# EAGLE board Memory V1.2.brd.old (EAGLE 9.6.2)
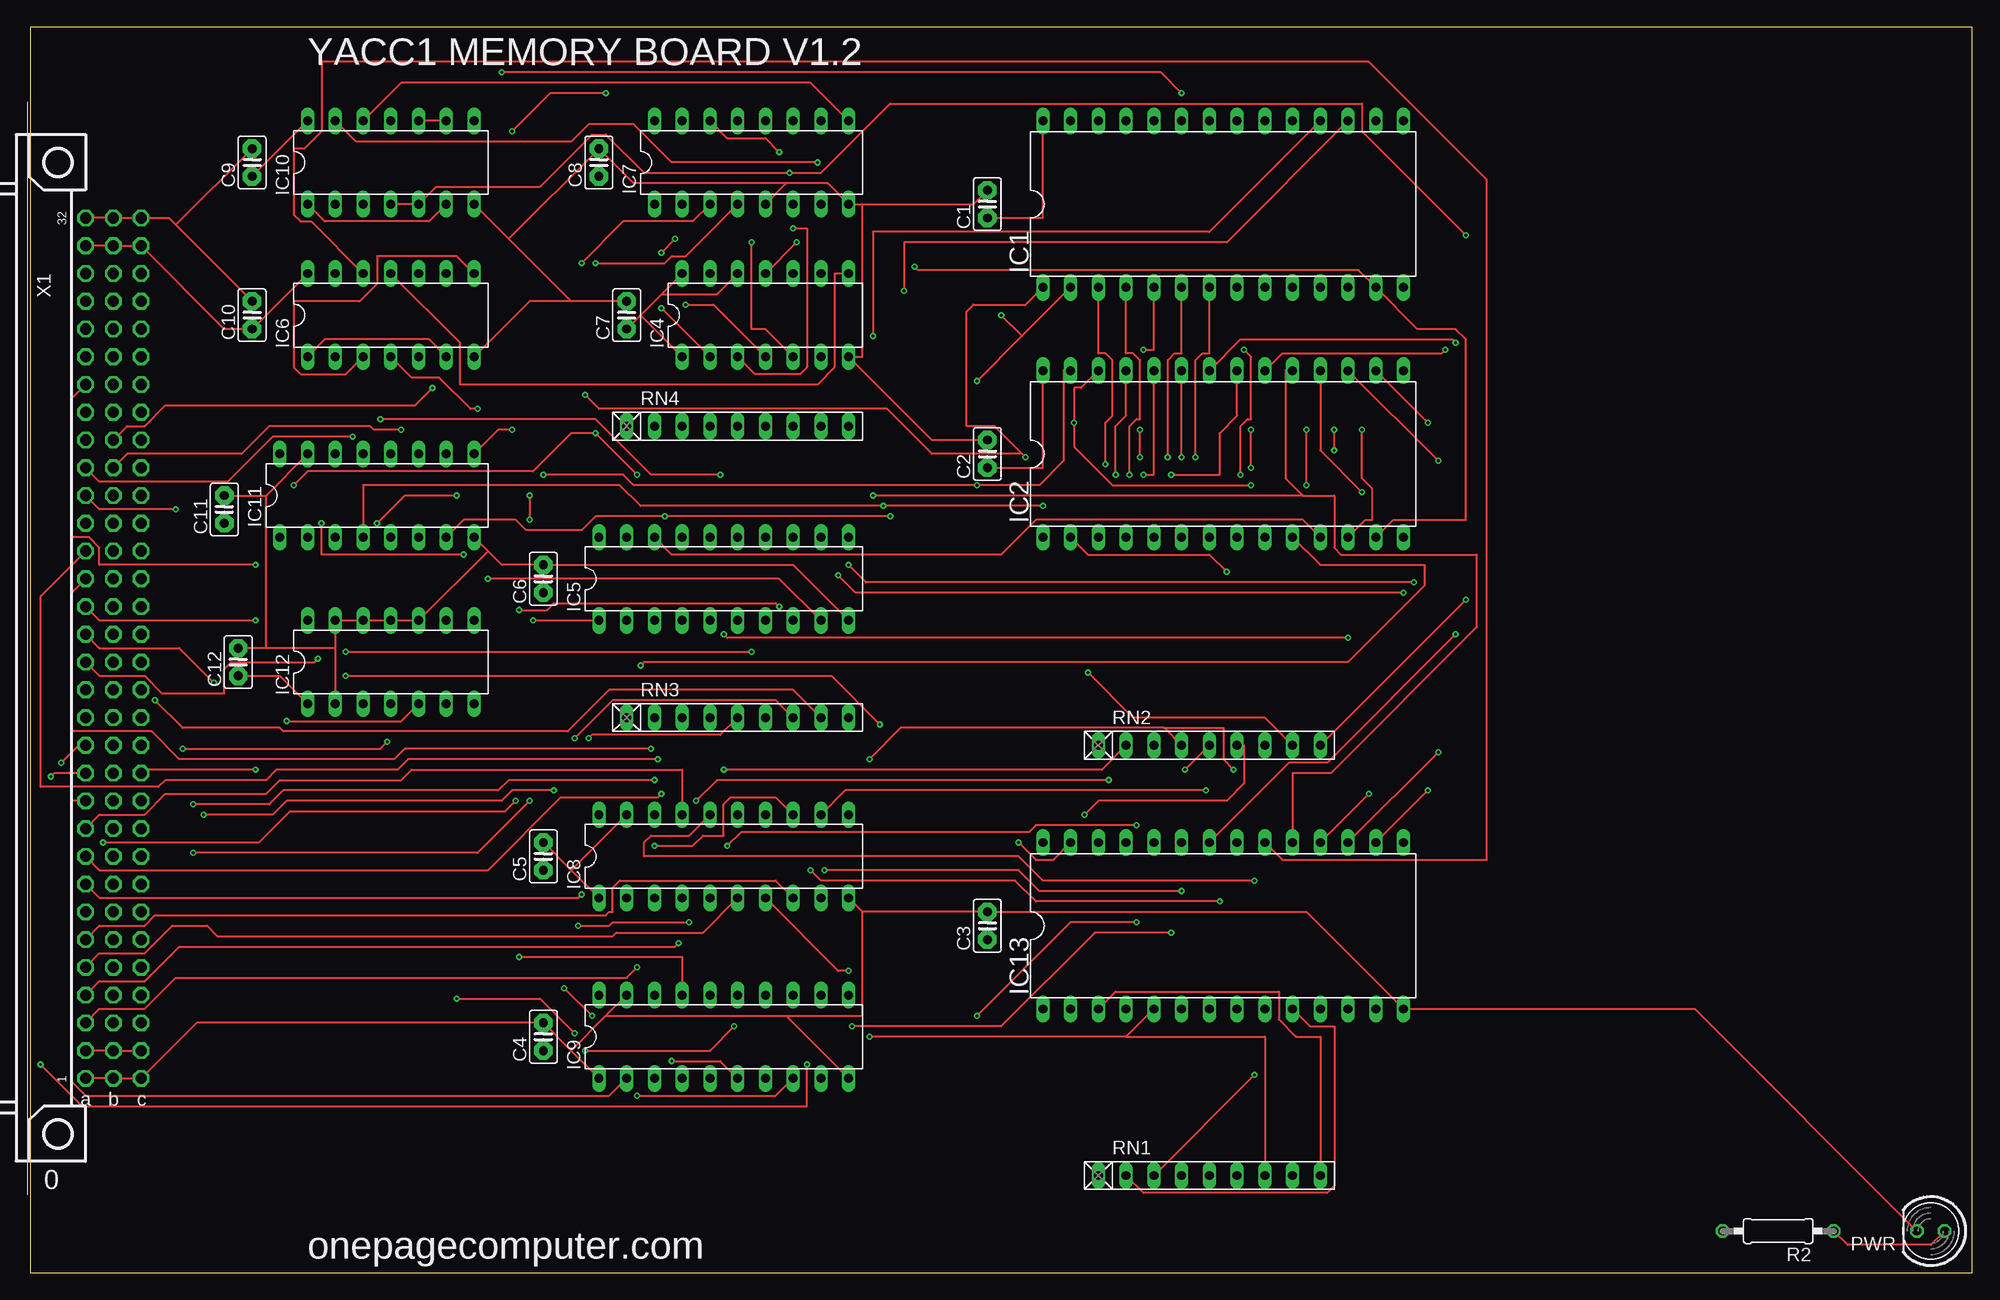
[diagram p0: board, top side]
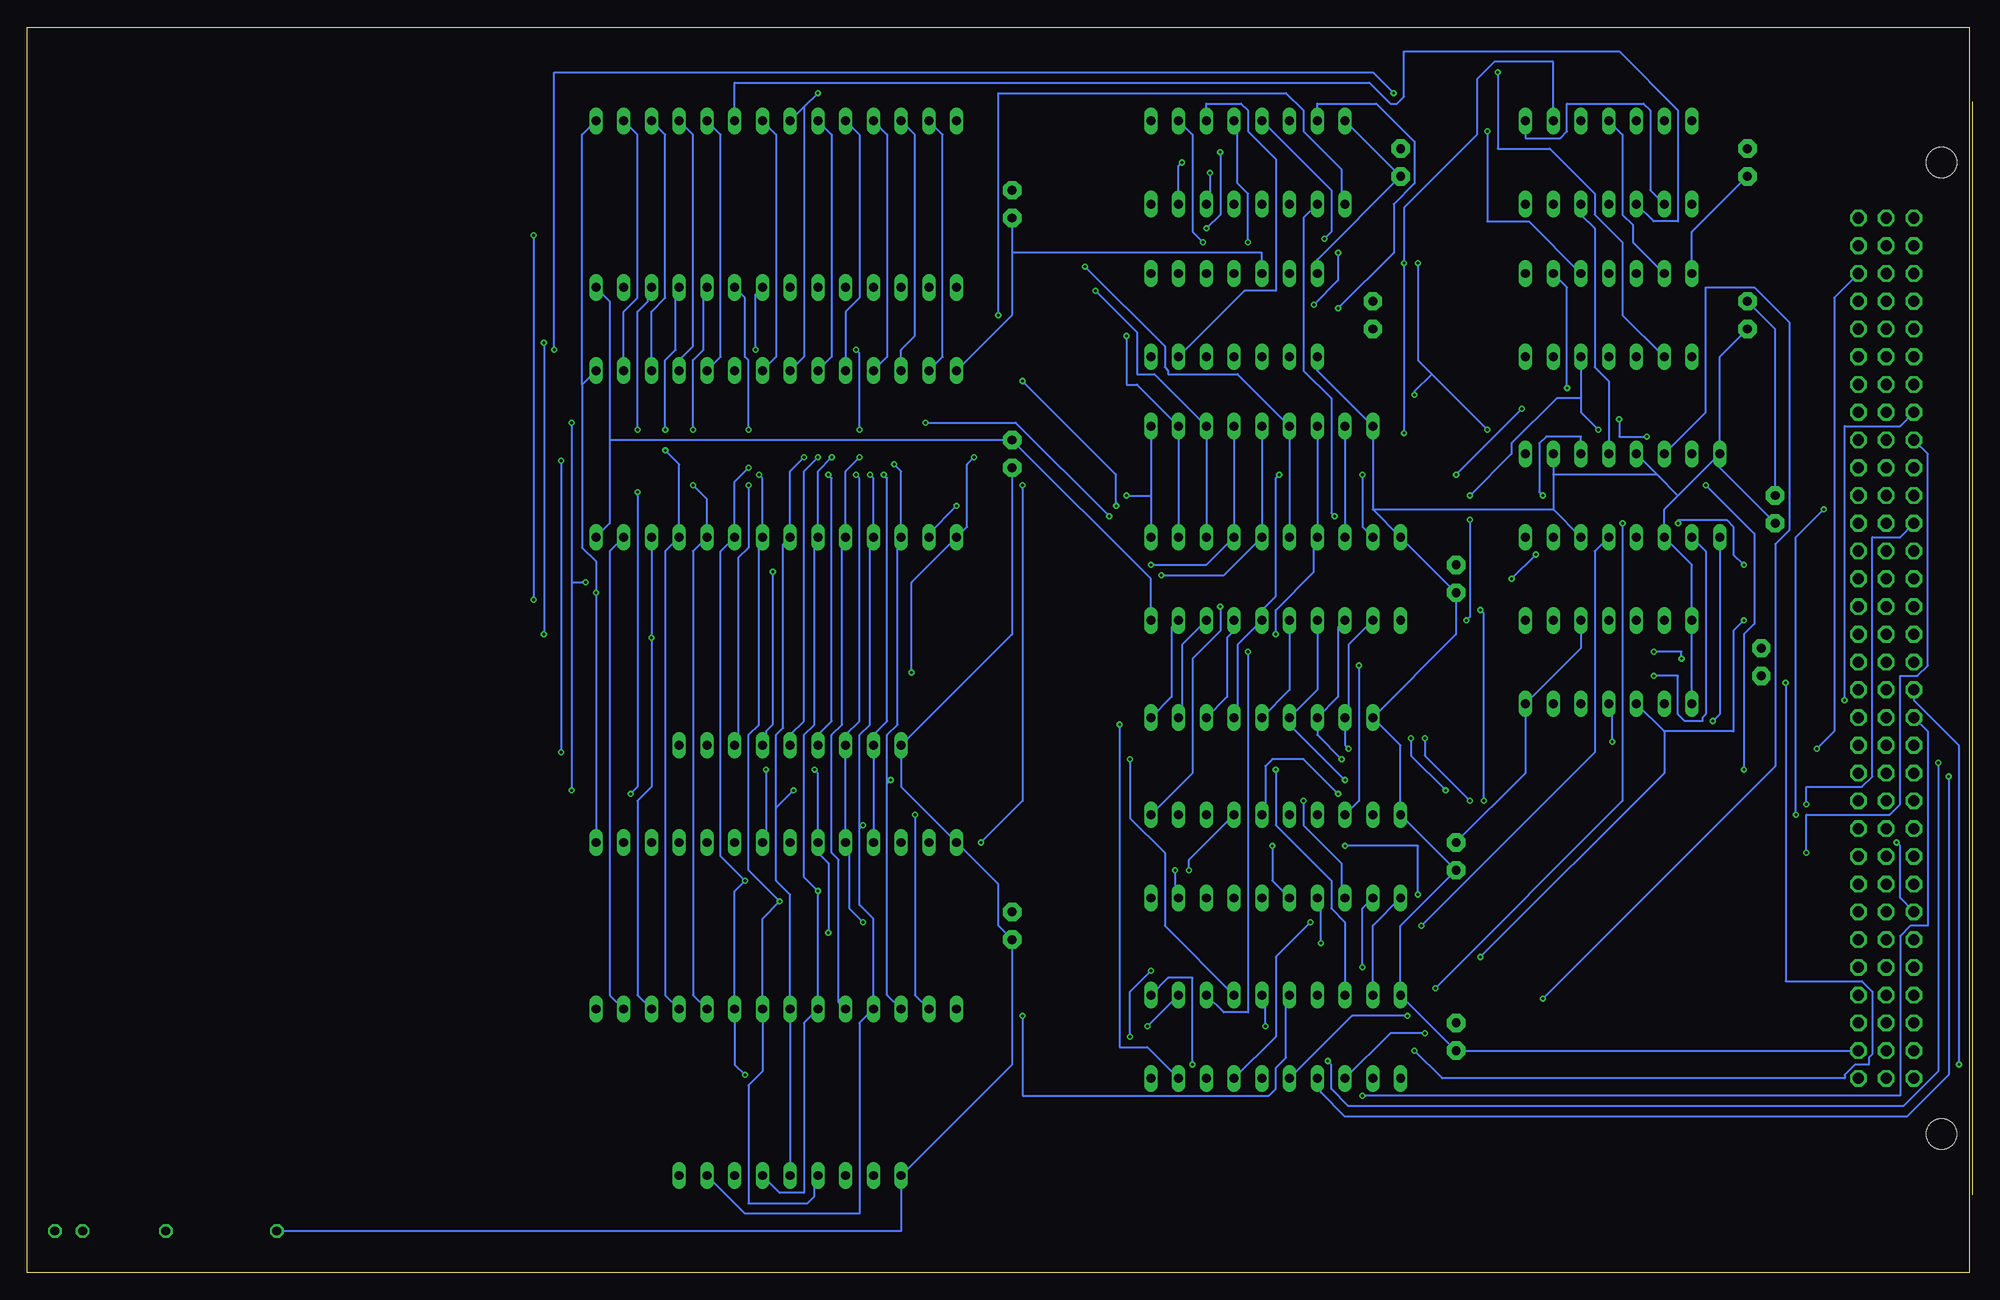
[diagram p1: board, bottom side, seen from below]

Size 177.78 x 113.97 mm. Coordinates in mm from the lower left corner, seen from the top.
Outline: 0,0 177.78,0 177.78,113.97 0,113.97 0,0
Copper layers (1*16): Top 0.035559375mm / dielectric 1.6mm / Bottom 0.035559375mm
Design rules "oshpark-2layer-auto-routing *": minimum track width 8mil, minimum drill 10mil, track to track 24mil, track to pad 10mil, pad to pad 8mil, via to via 8mil, smd to smd 6mil, copper to edge 15mil, drill to drill 6mil, minimum pad ring 6mil, minimum via ring 6mil, stop-mask expansion 2.5mil, vias tented up to drill 0mil, thermal gap 10mil
Net classes: 1 GND: width 1 mm; 2 5V: width 1 mm

## Footprints (pad centres in the part's own frame; a part is rotated, then mirrored left to right if it is on the bottom)
C025-025X050 = drill 0.813 pad 1.676 octagon: 1 -1.27,0; 2 1.27,0
DIL28-6 = drill 0.813 long: 1 -16.51,-7.62; 2 -13.97,-7.62; 3 -11.43,-7.62; 4 -8.89,-7.62; 5 -6.35,-7.62; 6 -3.81,-7.62; 7 -1.27,-7.62; 8 1.27,-7.62; 9 3.81,-7.62; 10 6.35,-7.62; 11 8.89,-7.62; 12 11.43,-7.62; 13 13.97,-7.62; 14 16.51,-7.62; 15 16.51,7.62; 16 13.97,7.62; 17 11.43,7.62; 18 8.89,7.62; 19 6.35,7.62; 20 3.81,7.62; 21 1.27,7.62; 22 -1.27,7.62; 23 -3.81,7.62; 24 -6.35,7.62; 25 -8.89,7.62; 26 -11.43,7.62; 27 -13.97,7.62; 28 -16.51,7.62
DIL14 = drill 0.813 long: 1 -7.62,-3.81; 2 -5.08,-3.81; 3 -2.54,-3.81; 4 0,-3.81; 5 2.54,-3.81; 6 5.08,-3.81; 7 7.62,-3.81; 8 7.62,3.81; 9 5.08,3.81; 10 2.54,3.81; 11 0,3.81; 12 -2.54,3.81; 13 -5.08,3.81; 14 -7.62,3.81
DIL20 = drill 0.813 long: 1 -11.43,-3.81; 2 -8.89,-3.81; 3 -6.35,-3.81; 4 -3.81,-3.81; 5 -1.27,-3.81; 6 1.27,-3.81; 7 3.81,-3.81; 8 6.35,-3.81; 9 8.89,-3.81; 10 11.43,-3.81; 11 11.43,3.81; 12 8.89,3.81; 13 6.35,3.81; 14 3.81,3.81; 15 1.27,3.81; 16 -1.27,3.81; 17 -3.81,3.81; 18 -6.35,3.81; 19 -8.89,3.81; 20 -11.43,3.81
DIL16 = drill 0.813 long: 1 -8.89,-3.81; 2 -6.35,-3.81; 3 -3.81,-3.81; 4 -1.27,-3.81; 5 1.27,-3.81; 6 3.81,-3.81; 7 6.35,-3.81; 8 8.89,-3.81; 9 8.89,3.81; 10 6.35,3.81; 11 3.81,3.81; 12 1.27,3.81; 13 -1.27,3.81; 14 -3.81,3.81; 15 -6.35,3.81; 16 -8.89,3.81
LED5MM = drill 0.813 octagon: A -1.27,0; K 1.27,0
0207/10 = drill 0.813 octagon: 1 -5.08,0; 2 5.08,0
RN-9 = drill 0.813 long: 1 -10.16,0; 2 -7.62,0; 3 -5.08,0; 4 -2.54,0; 5 0,0; 6 2.54,0; 7 5.08,0; 8 7.62,0; 9 10.16,0
FABC96R = drill 1.016 octagon: A1 -2.54,39.37; A2 -2.54,36.83; A3 -2.54,34.29; A4 -2.54,31.75; A5 -2.54,29.21; A6 -2.54,26.67; A7 -2.54,24.13; A8 -2.54,21.59; A9 -2.54,19.05; A10 -2.54,16.51; A11 -2.54,13.97; A12 -2.54,11.43; A13 -2.54,8.89; A14 -2.54,6.35; A15 -2.54,3.81; A16 -2.54,1.27; A17 -2.54,-1.27; A18 -2.54,-3.81; A19 -2.54,-6.35; A20 -2.54,-8.89; A21 -2.54,-11.43; A22 -2.54,-13.97; A23 -2.54,-16.51; A24 -2.54,-19.05; A25 -2.54,-21.59; A26 -2.54,-24.13; A27 -2.54,-26.67; A28 -2.54,-29.21; A29 -2.54,-31.75; A30 -2.54,-34.29; A31 -2.54,-36.83; A32 -2.54,-39.37; B1 -5.08,39.37; B2 -5.08,36.83; B3 -5.08,34.29; B4 -5.08,31.75; B5 -5.08,29.21; B6 -5.08,26.67; B7 -5.08,24.13; B8 -5.08,21.59; B9 -5.08,19.05; B10 -5.08,16.51; B11 -5.08,13.97; B12 -5.08,11.43; B13 -5.08,8.89; B14 -5.08,6.35; B15 -5.08,3.81; B16 -5.08,1.27; B17 -5.08,-1.27; B18 -5.08,-3.81; B19 -5.08,-6.35; B20 -5.08,-8.89; B21 -5.08,-11.43; B22 -5.08,-13.97; B23 -5.08,-16.51; B24 -5.08,-19.05; B25 -5.08,-21.59; B26 -5.08,-24.13; B27 -5.08,-26.67; B28 -5.08,-29.21; B29 -5.08,-31.75; B30 -5.08,-34.29; B31 -5.08,-36.83; B32 -5.08,-39.37; C1 -7.62,39.37; C2 -7.62,36.83; C3 -7.62,34.29; C4 -7.62,31.75; C5 -7.62,29.21; C6 -7.62,26.67; C7 -7.62,24.13; C8 -7.62,21.59; C9 -7.62,19.05; C10 -7.62,16.51; C11 -7.62,13.97; C12 -7.62,11.43; C13 -7.62,8.89; C14 -7.62,6.35; C15 -7.62,3.81; C16 -7.62,1.27; C17 -7.62,-1.27; C18 -7.62,-3.81; C19 -7.62,-6.35; C20 -7.62,-8.89; C21 -7.62,-11.43; C22 -7.62,-13.97; C23 -7.62,-16.51; C24 -7.62,-19.05; C25 -7.62,-21.59; C26 -7.62,-24.13; C27 -7.62,-26.67; C28 -7.62,-29.21; C29 -7.62,-31.75; C30 -7.62,-34.29; C31 -7.62,-36.83; C32 -7.62,-39.37 | hole 2.794: 0,-44.456; 0,44.456

## Placement (x,y rotation side)
C1  [C025-025X050]  87.63,97.79 90 top
C2  [C025-025X050]  87.63,74.93 90 top
C3  [C025-025X050]  87.63,31.75 90 top
C4  [C025-025X050]  46.99,21.59 90 top
C5  [C025-025X050]  46.99,38.1 90 top
C6  [C025-025X050]  46.99,63.5 90 top
C7  [C025-025X050]  54.61,87.63 90 top
C8  [C025-025X050]  52.07,101.6 90 top
C9  [C025-025X050]  20.32,101.6 90 top
C10  [C025-025X050]  20.32,87.63 90 top
C11  [C025-025X050]  17.78,69.85 90 top
C12  [C025-025X050]  19.05,55.88 90 top
IC1  [DIL28-6]  109.22,97.79 0 top
IC2  [DIL28-6]  109.22,74.93 0 top
IC4  74ALS30N  [DIL14]  67.31,87.63 0 top
IC5  74LS245N  [DIL20]  63.5,63.5 0 top
IC6  74LS04N  [DIL14]  33.02,87.63 0 top
IC7  74LS138N  [DIL16]  66.04,101.6 0 top
IC8  74LS244N  [DIL20]  63.5,38.1 0 top
IC9  74LS244N  [DIL20]  63.5,21.59 0 top
IC10  74ALS00N  [DIL14]  33.02,101.6 0 top
IC11  74LS157N  [DIL16]  31.75,71.12 0 top
IC12  74LS74N  [DIL14]  33.02,55.88 0 top
IC13  [DIL28-6]  109.22,31.75 0 top
PWR  [LED5MM]  173.99,3.81 180 top
R2  330  [0207/10]  160.02,3.81 180 top
RN1  [RN-9]  107.95,8.89 0 top
RN2  [RN-9]  107.95,48.26 0 top
RN3  [RN-9]  64.77,50.8 0 top
RN4  [RN-9]  64.77,77.47 0 top
X1  FABC96R  [FABC96R]  2.54,57.15 180 top

## Library data of the parts
C1-C12 IC5 = adafruit
IC1 IC2 = memory-hitachi; OC_FARNELL: unknown; OC_NEWARK: unknown
IC4 IC6-IC12 = 74xx-us
IC13 = memory-nec; MPN: AT28C64B-15PU; OC_FARNELL: 1095784; OC_NEWARK: 96K6557
PWR = led
R2 = eagle-ltspice; SPICEMODEL: NONE; SPICEPREFIX: R
RN1-RN4 = resistor-net; OC_FARNELL: unknown; OC_NEWARK: unknown
X1 = con-vg

## Nets
-AC-LD: X1.C22
-AC-LD-INV: X1.C20
-AC-RD: X1.C21
-ADDR-REG-LD0: X1.C4
-ADDR-REG-LD1: X1.C6
-ADDR-REG-RD0: X1.C3
-ADDR-REG-RD1: X1.C5
-ALU-FUNC: X1.C15
-BUS-EN: X1.C28
-HI-RAM: IC2.20 IC6.10
-HL-SWAP: X1.C25
-IN: X1.C26
-INT: X1.C13
-INTA: X1.C14
-IO-ADDR-LD: X1.C11
-IO-RD: X1.B25
-IO-WR: X1.B26
-LO-RAM: IC1.20 IC10.3
-MEM-RD: IC5.1 IC6.5 X1.B23
-MEM-WR: IC6.9 X1.B24
-OUT: X1.C27
-REG-DN: X1.B21
-REG-FUNC-LD: X1.B8
-REG-FUNC-RD: X1.B7
-REG-LD-HI: X1.B20
-REG-LD-LO: X1.B18
-REG-RD-HI: X1.B19
-REG-RD-LO: X1.B17
-REG-UP: X1.B22
-RESET: IC12.4 X1.C30
-ROM-CS: IC6.12 IC13.20
-ROME000: IC7.9 IC10.12
-ROMF000: IC7.7 IC10.13
-RUN: X1.C29
-SR-LD: X1.C23
-TMP-REG-LD0: X1.B28
-TMP-REG-LD1: X1.B30
-TMP-REG-RD0: X1.B27
-TMP-REG-RD1: X1.B29
-VMA: IC5.19 IC7.4 IC10.9 IC10.10 X1.C12
ADDR0: IC8.2 X1.A3
ADDR1: IC8.4 X1.A4
ADDR2: IC8.6 X1.A5
ADDR3: IC8.8 X1.A6
ADDR4: IC8.11 X1.A7
ADDR5: IC8.13 X1.A8
ADDR6: IC8.15 X1.A9
ADDR7: IC8.17 X1.A10
ADDR8: IC9.2 X1.A11
ADDR9: IC9.4 X1.A12
ADDR10: IC9.6 X1.A13
ADDR11: IC9.8 X1.A14
ADDR12: IC9.11 X1.A15
ADDR13: IC9.13 X1.A16
ADDR14: IC9.15 X1.A17
ADDR15: IC9.17 IC12.3 X1.A18
ALU0: X1.C16
ALU1: X1.C17
ALU2: X1.C18
ALU3: X1.C19
BADDR0: IC1.10 IC2.10 IC8.18 IC13.10 RN1.2
BADDR1: IC1.9 IC2.9 IC8.16 IC13.9 RN1.3
BADDR2: IC1.8 IC2.8 IC8.14 IC13.8 RN1.4
BADDR3: IC1.7 IC2.7 IC8.12 IC13.7 RN1.5
BADDR4: IC1.6 IC2.6 IC8.9 IC13.6 RN1.6
BADDR5: IC1.5 IC2.5 IC8.7 IC13.5 RN1.7
BADDR6: IC1.4 IC2.4 IC8.5 IC13.4 RN1.8
BADDR7: IC1.3 IC2.3 IC8.3 IC13.3 RN1.9
BADDR8: IC1.25 IC2.25 IC9.18 IC13.25 RN2.2
BADDR9: IC1.24 IC2.24 IC9.16 IC13.24 RN2.3
BADDR10: IC1.21 IC2.21 IC9.14 IC13.21 RN2.4
BADDR11: IC1.23 IC2.23 IC9.12 IC13.23 RN2.5
BADDR12: IC1.2 IC2.2 IC7.1 IC11.4 IC13.2 RN2.6
BADDR13: IC1.26 IC2.26 IC7.2 IC11.7 RN2.7
BADDR14: IC1.1 IC2.1 IC7.3 IC11.9 RN2.8
BADDR15: IC7.6 IC10.4 IC10.5 IC11.12 RN2.9
BDATA0: IC1.11 IC2.11 IC5.18 IC13.11 RN4.2
BDATA1: IC1.12 IC2.12 IC5.17 IC13.12 RN4.3
BDATA2: IC1.13 IC2.13 IC5.16 IC13.13 RN4.4
BDATA3: IC1.15 IC2.15 IC5.15 IC13.15 RN4.5
BDATA4: IC1.16 IC2.16 IC5.14 IC13.16 RN4.6
BDATA5: IC1.17 IC2.17 IC5.13 IC13.17 RN4.7
BDATA6: IC1.18 IC2.18 IC5.12 IC13.18 RN4.8
BDATA7: IC1.19 IC2.19 IC5.11 IC13.19 RN4.9
BR-COND: X1.C24
DATA0: IC5.2 RN3.2 X1.A19
DATA1: IC5.3 RN3.3 X1.A20
DATA2: IC5.4 RN3.4 X1.A21
DATA3: IC5.5 RN3.5 X1.A22
DATA4: IC5.6 RN3.6 X1.A23
DATA5: IC5.7 RN3.7 X1.A24
DATA6: IC5.8 RN3.8 X1.A25
DATA7: IC5.9 RN3.9 X1.A26
DATA8: X1.A27
DATA9: X1.A28
DATA10: X1.A29
DATA11: X1.A30
DATA12: X1.B3
DATA13: X1.B4
DATA14: X1.B5
DATA15: X1.B6
FORCE-ROM: IC11.1 IC12.5
GND: C1.2 C2.2 C3.2 C4.2 C5.2 C6.2 C7.2 C8.2 C9.2 C10.2 C11.2 C12.2 IC1.14 IC2.14 IC4.7 IC5.10 IC6.7 IC7.5 IC7.8 IC8.1 IC8.10 IC8.19 IC9.1 IC9.10 IC9.19 IC10.7 IC11.8 IC11.15 IC12.2 IC12.7 IC12.10 IC12.11 IC12.12 IC12.13 IC13.14 PWR.K X1.A1 X1.A32 X1.B1 X1.B32 X1.C1 X1.C32
IO-ADDR0: X1.C7
IO-ADDR1: X1.C8
IO-ADDR2: X1.C9
IO-ADDR3: X1.C10
MEM-RD: IC6.1 IC6.6
N$1: IC6.13 IC10.11
N$2: IC6.3 IC6.8
N$3: IC1.22 IC2.22 IC6.2 IC13.22
N$4: IC1.27 IC2.27 IC6.4 IC13.27
N$5: IC4.11 IC7.10
N$6: IC4.6 IC7.11
N$7: IC4.5 IC7.12
N$8: IC4.4 IC7.13
N$9: IC4.3 IC7.14
N$10: IC4.2 IC7.15
N$11: PWR.A R2.1
N$12: IC10.2 IC10.8
N$13: IC10.1 IC10.6
N$14: IC4.8 IC6.11
N$15: IC9.9 IC11.2
N$16: IC9.7 IC11.5
N$17: IC9.5 IC11.11
N$18: IC9.3 IC11.14
REG-LD-ID0: X1.B13
REG-LD-ID1: X1.B14
REG-LD-ID2: X1.B15
REG-LD-ID3: X1.B16
REG-RD-ID0: X1.B9
REG-RD-ID1: X1.B10
REG-RD-ID2: X1.B11
REG-RD-ID3: X1.B12
VCC: C1.1 C2.1 C3.1 C4.1 C5.1 C6.1 C7.1 C8.1 C9.1 C10.1 C11.1 C12.1 IC1.28 IC2.28 IC4.1 IC4.12 IC4.14 IC5.20 IC6.14 IC7.16 IC8.20 IC9.20 IC10.14 IC11.3 IC11.6 IC11.10 IC11.13 IC11.16 IC12.1 IC12.14 IC13.28 R2.2 RN1.1 RN2.1 RN3.1 RN4.1 X1.A2 X1.A31 X1.B2 X1.B31 X1.C2 X1.C31

## Tracks (layer width: path | path; a pad name or v marks a point on that pad's centre or on a via)
-HI-RAM  (via drill 0.25)
  Top 0.203: v44.13,104.46 47.62,107.95 v52.7,107.95 | v129.54,84.45 129.22,84.14 114.62,84.14 IC2.20
  Bottom 0.203: IC6.10 40.32,96.2 44.13,96.2 v44.13,104.46 | v52.7,107.95 54.61,109.86 129.54,109.86 v129.54,84.45
-LO-RAM
  Bottom 0.203: IC10.3 28.89,96.2 26.67,96.2 26.67,106.36 32.07,111.76 51.75,111.76 51.75,107.63 52.39,107 53.02,107 54.93,108.9 113.03,108.9 IC1.20
-MEM-RD  (via drill 0.25)
  Top 0.203: v46.04,59.69 IC5.1 | v45.72,71.12 v45.72,68.9 | X1.B23 8.89,74.93 19.37,74.93 21.91,77.47 31.11,77.47 31.43,77.15 v33.97,77.15
  Bottom 0.203: v46.04,59.69 45.72,60.01 v45.72,68.9 | v45.72,71.12 41.91,74.93 41.91,75.88 37.78,80.01 35.56,80.01 | IC6.5 35.56,80.01 | v33.97,77.15 35.56,78.74 35.56,80.01
-MEM-WR  (via drill 0.25)
  Top 0.203: v36.83,80.96 35.24,79.38 12.38,79.38 10.48,77.47 8.89,77.47 X1.B24
  Bottom 0.203: IC6.9 36.83,90.17 v36.83,80.96
-RESET  (via drill 0.25)
  Top 0.203: v32.7,48.58 32.07,47.94 v13.97,47.94
  Bottom 0.203: IC12.4 32.7,51.75 v32.7,48.58 | v13.97,47.94 12.38,49.53 12.38,89.22 X1.C30
-ROM-CS
  Top 0.203: IC6.12 25.72,96.2 24.77,96.2 24.13,96.84 24.13,102.87 25.08,102.87 26.67,104.46 26.67,110.81 122.56,110.81 133.35,100.01 133.35,37.78 114.62,37.78 IC13.20
-ROME000
  Top 0.203: IC10.12 33.97,108.9 71.44,108.9 IC7.9
-ROMF000  (via drill 0.25)
  Top 0.203: IC10.13 29.84,103.5 49.53,103.5 51.12,105.09 55.24,105.09 58.74,101.6 v72.07,101.6
  Bottom 0.203: v72.07,101.6 72.39,101.28 IC7.7
-VMA  (via drill 0.25)
  Top 0.203: v55.56,73.03 v51.75,76.83 49.53,76.83 46.04,73.34 25.4,73.34 v24.13,72.07 | IC10.9 IC10.10 | IC7.4 60.01,93.03 58.74,93.03 58.1,92.39 v51.75,92.39 | X1.C12 10.48,46.04 v20.64,46.04
  Bottom 0.203: IC5.19 55.56,68.26 v55.56,73.03 | v51.75,76.83 v51.75,92.39 51.75,97.47 45.09,104.14 45.09,109.22 43.5,110.81 38.1,110.81 IC10.9 | v20.64,46.04 20.64,58.42 19.68,59.37 19.68,67.63 v24.13,72.07
ADDR0  (via drill 0.25)
  Top 0.203: v55.56,27.94 54.61,26.99 13.34,26.99 10.48,24.13 6.35,24.13 X1.A3
  Bottom 0.203: IC8.2 55.56,33.34 v55.56,27.94
ADDR1  (via drill 0.25)
  Top 0.203: v59.37,30.16 59.05,29.84 13.65,29.84 10.48,26.67 6.35,26.67 X1.A4
  Bottom 0.203: IC8.4 59.37,33.97 v59.37,30.16
ADDR2
  Top 0.203: IC8.6 61.59,31.11 53.66,31.11 53.34,30.8 17.14,30.8 16.19,31.75 13.02,31.75 10.48,29.21 6.35,29.21 X1.A5
ADDR3
  Top 0.203: IC8.8 68.26,35.88 53.98,35.88 53.34,35.24 53.34,33.02 53.02,33.02 52.7,32.7 11.43,32.7 10.48,31.75 6.35,31.75 X1.A6
ADDR4  (via drill 0.25)
  Top 0.203: v68.58,60.96 68.26,61.28 47.94,61.28 47.31,60.64 v44.77,60.64 | v44.45,43.18 43.5,42.23 23.81,42.23 20.95,39.37 v6.67,39.37
  Bottom 0.203: IC8.11 71.12,45.72 71.12,56.2 68.58,58.74 v68.58,60.96 | v44.77,60.64 44.45,60.33 v44.45,43.18 | v6.67,39.37 6.35,39.05 6.35,34.29 X1.A7
ADDR5  (via drill 0.25)
  Top 0.203: IC8.13 68.26,43.5 64.14,43.5 63.5,42.86 63.5,40.01 61.59,40.01 60.64,39.05 v57.15,39.05 | v50.48,34.61 50.16,34.29 6.35,34.29 X1.A8
  Bottom 0.203: v57.15,39.05 50.48,39.05 v50.48,34.61
ADDR6  (via drill 0.25)
  Top 0.203: v57.78,43.81 57.47,43.5 48.58,43.5 41.91,36.83 6.35,36.83 X1.A9
  Bottom 0.203: IC8.15 64.45,42.23 64.45,46.35 63.82,46.99 60.96,46.99 v57.78,43.81
ADDR7
  Top 0.203: IC8.17 59.69,46.04 34.92,46.04 33.97,45.09 22.86,45.09 21.59,43.81 12.38,43.81 10.48,41.91 6.35,41.91 X1.A10
ADDR8
  Top 0.203: IC9.2 53.02,16.19 5.08,16.19 3.81,17.46 3.81,43.18 X1.A11
ADDR9  (via drill 0.25)
  Top 0.203: v1.91,45.4 2.22,45.72 X1.A12
  Bottom 0.203: IC9.4 59.37,17.46 59.37,16.51 57.15,14.29 5.71,14.29 1.91,18.1 v1.91,45.4
ADDR10  (via drill 0.25)
  Top 0.203: IC9.6 63.18,19.37 v58.74,19.37 | v2.86,46.67 4.45,48.26 X1.A13
  Bottom 0.203: v58.74,19.37 58.42,19.05 58.42,16.83 56.83,15.24 6.03,15.24 2.86,18.41 v2.86,46.67
ADDR11  (via drill 0.25)
  Top 0.203: IC9.8 68.26,16.19 v55.56,16.19
  Bottom 0.203: v55.56,16.19 6.35,16.19 6.35,30.8 5.4,31.75 3.81,31.75 3.81,49.53 X1.A14
ADDR12  (via drill 0.25)
  Top 0.203: v71.12,19.05 71.12,15.24 4.76,15.24 v0.95,19.05
  Bottom 0.203: IC9.11 73.34,26.99 71.12,26.99 v71.12,19.05 | v0.95,19.05 0.95,48.26 5.08,52.39 X1.A15
ADDR13  (via drill 0.25)
  Top 0.203: v28.89,56.83 v66.04,56.83 | v26.35,56.2 26.04,55.88 18.41,55.88 17.78,55.24 17.78,53.02 12.06,53.02 10.48,54.61 6.35,54.61 X1.A16
  Bottom 0.203: IC9.13 68.26,23.81 66.04,23.81 v66.04,56.83 | v28.89,56.83 26.35,56.83 v26.35,56.2
ADDR14  (via drill 0.25)
  Top 0.203: v64.45,22.54 62.23,20.32 v50.8,20.32 | v16.83,53.98 13.65,57.15 6.35,57.15 X1.A17
  Bottom 0.203: IC9.15 64.45,25.08 v64.45,22.54 | v50.8,20.32 48.26,17.78 11.43,17.78 11.43,18.1 10.48,19.05 9.21,19.05 9.21,19.68 8.89,20 8.89,25.72 9.84,26.67 16.83,26.67 v16.83,53.98
ADDR15  (via drill 0.25)
  Top 0.203: v20.64,59.69 6.35,59.69 X1.A18 | IC9.17 59.69,28.89 v44.77,28.89
  Bottom 0.203: 27.94,49.53 IC12.3 | 27.94,49.53 21.59,49.53 21.59,58.74 v20.64,59.69 | v44.77,28.89 27.94,45.72 27.94,49.53
BADDR0  (via drill 0.25)
  Top 0.203: RN1.2 101.92,7.3 118.75,7.3 119.38,7.94 119.38,22.54 117.16,22.54 IC13.10 | v55.88,55.56 56.2,55.88 120.65,55.88 127.64,62.87 127.64,64.77 118.11,64.77 IC2.10 | v116.84,72.07 v116.84,77.15
  Bottom 0.203: IC8.18 55.88,43.18 v55.88,55.56 | IC1.10 115.89,89.85 115.89,84.45 116.84,83.5 v116.84,77.15 | v116.84,72.07 115.57,70.8 IC2.10 116.84,66.04 116.84,25.4 IC13.10
BADDR1  (via drill 0.25)
  Top 0.203: IC8.16 60.33,40.01 56.83,40.01 56.2,39.37 56.2,38.1 90.49,38.1 92.71,35.88 v112.08,35.88 | v112.08,18.1 RN1.3 | v111.76,73.66 v111.76,77.15
  Bottom 0.203: v112.08,18.1 113.03,19.05 IC13.9 113.03,34.92 v112.08,35.88 114.3,38.1 114.3,66.04 IC2.9 113.03,72.39 v111.76,73.66 | IC1.9 112.08,89.22 112.08,83.82 111.76,83.5 v111.76,77.15
BADDR2  (via drill 0.25)
  Top 0.203: v71.44,36.83 72.39,35.88 90.17,35.88 92.08,33.97 v108.9,33.97 | v111.12,84.45 111.76,83.82 111.76,78.11 111.44,78.11 110.81,77.47 v110.81,73.03
  Bottom 0.203: IC8.14 71.44,37.78 v71.44,36.83 | RN1.4 105.73,8.57 105.73,6.99 106.36,6.35 111.76,6.35 111.76,17.14 110.49,18.41 IC13.8 110.49,32.38 v108.9,33.97 111.76,36.83 111.76,49.21 110.81,50.16 110.81,66.99 IC2.8 110.49,72.71 v110.81,73.03 | IC1.8 111.12,89.53 v111.12,84.45
BADDR3  (via drill 0.25)
  Top 0.203: IC8.12 74.61,44.13 v107.63,44.13 | IC1.7 107.95,84.14 107.31,84.14 106.68,83.5 v106.68,74.61
  Bottom 0.203: 109.22,42.55 v107.63,44.13 | 109.22,42.55 109.22,35.88 107.95,34.61 IC13.7 RN1.5 | 109.22,42.55 109.22,49.21 108.58,49.85 108.58,66.67 IC2.7 107.95,73.34 v106.68,74.61
BADDR4  (via drill 0.25)
  Top 0.203: v72.71,36.83 90.49,36.83 92.39,34.92 v105.41,34.92 | IC1.6 105.41,84.14 104.78,84.14 104.14,83.5 v104.14,74.61
  Bottom 0.203: IC8.9 72.71,34.61 v72.71,36.83 | RN1.6 108.9,7.3 106.68,7.3 106.68,22.86 IC13.6 v105.41,34.92 106.68,36.2 106.68,49.21 105.73,50.16 105.73,66.99 IC2.6 105.41,73.34 v104.14,74.61
BADDR5  (via drill 0.25)
  Top 0.203: IC8.7 73.98,27.62 v74.93,27.62 | 100.33,21.59 v76.83,21.59 | IC13.5 100.33,21.59 | RN1.7 113.03,21.59 100.33,21.59 | IC1.5 102.87,84.45 v101.92,84.45 | v101.6,74.61 v101.6,77.15
  Bottom 0.203: v74.93,27.62 76.83,25.72 v76.83,21.59 | IC13.5 103.5,24.77 103.5,37.78 104.14,38.42 104.14,49.21 103.19,50.16 103.19,66.99 IC2.5 102.87,73.34 v101.6,74.61 | v101.92,84.45 101.6,84.14 v101.6,77.15
BADDR6  (via drill 0.25)
  Top 0.203: v63.82,39.05 65.09,40.32 91.44,40.32 92.08,40.96 v101.28,40.96 | IC1.4 100.33,84.14 100.97,84.14 101.6,83.5 101.6,78.11 101.28,78.11 100.65,77.47 v100.65,73.03
  Bottom 0.203: IC8.5 63.82,35.88 v63.82,39.05 | 101.6,40.64 v101.28,40.96 | 101.6,40.64 101.6,33.66 100.33,32.38 IC13.4 101.6,22.86 101.6,5.4 112.08,5.4 RN1.8 | 101.6,40.64 101.6,49.21 100.65,50.16 100.65,66.99 IC2.4 100.33,72.71 v100.65,73.03
BADDR7  (via drill 0.25)
  Top 0.203: v60.96,43.18 62.87,45.09 v98.74,45.09 | IC1.3 97.79,84.14 98.42,84.14 99.06,83.5 99.06,78.42 98.42,77.79 v98.42,73.98 | RN1.9 118.11,21.59 115.89,21.59 114.3,23.18 114.3,25.72 99.38,25.72 IC13.3
  Bottom 0.203: IC8.3 57.47,34.61 57.47,37.47 60.96,40.96 v60.96,43.18 | 99.06,44.77 v98.74,45.09 | 99.06,44.77 99.06,25.4 IC13.3 | 99.06,44.77 99.06,49.21 98.11,50.16 98.11,66.99 IC2.3 97.79,73.34 v98.42,73.98
BADDR8  (via drill 0.25)
  Top 0.203: v63.5,46.04 98.11,46.04 RN2.2 | IC2.25 100.33,78.42 99.38,77.47 v99.38,73.03
  Bottom 0.203: IC2.25 99.06,83.82 99.06,104.14 IC1.25 | IC9.18 57.15,32.07 58.42,33.34 58.42,35.88 63.5,40.96 v63.5,46.04 | IC13.25 RN2.2 100.33,49.21 99.06,50.48 99.06,72.71 v99.38,73.03
BADDR9  (via drill 0.25)
  Top 0.203: v86.68,23.5 95.25,32.07 v101.28,32.07 | IC2.24 102.87,73.03 v101.92,73.03
  Bottom 0.203: IC2.24 102.87,87.95 101.6,89.22 101.6,104.14 IC1.24 | IC9.16 62.55,25.08 62.55,19.68 63.5,18.73 63.5,16.83 64.14,16.19 86.68,16.19 v86.68,23.5 | v101.28,32.07 102.55,33.34 102.55,39.05 IC13.24 RN2.3 102.87,49.21 101.6,50.48 101.6,72.71 v101.92,73.03
BADDR10  (via drill 0.25)
  Top 0.203: v76.83,46.99 79.69,49.85 103.82,49.85 | RN2.4 103.82,49.85 | v110.17,46.04 109.22,46.99 109.22,49.85 103.82,49.85 | IC2.21 110.49,78.42 108.9,76.83 108.9,73.03 v104.46,73.03
  Bottom 0.203: IC2.21 109.22,83.82 109.22,104.14 IC1.21 | IC9.14 73.66,31.75 73.66,38.42 76.83,41.59 v76.83,46.99 | IC13.21 110.17,39.69 v110.17,46.04 | v104.46,73.03 104.14,72.71 104.14,50.48 105.41,49.21 RN2.4
BADDR11  (via drill 0.25)
  Top 0.203: v75.25,22.54 88.9,22.54 97.47,31.11 v104.46,31.11 | v105.73,46.04 RN2.5 | v105.41,74.61 IC2.23
  Bottom 0.203: IC2.23 104.14,83.82 104.14,104.14 IC1.23 | v75.25,22.54 IC9.12 | v104.46,31.11 104.46,37.47 105.41,38.42 IC13.23 105.41,45.72 v105.73,46.04 | v105.41,74.61 106.68,73.34 106.68,50.48 107.95,49.21 RN2.5
BADDR12  (via drill 0.25)
  Top 0.203: v96.52,41.91 97.79,43.18 109.54,43.18 111.12,44.77 111.12,48.26 RN2.6 | IC11.4 30.48,72.07 53.98,72.07 55.88,70.17 v78.11,70.17 v92.71,70.17 | v86.68,81.6 90.81,85.72 | 90.81,85.72 IC1.2 | 90.81,85.72 v88.9,87.63 | v109.54,64.14 107.95,65.72 96.84,65.72 IC2.2
  Bottom 0.203: IC13.2 96.52,25.4 v96.52,41.91 | v92.71,70.17 95.25,67.63 IC2.2 | v86.68,81.6 78.11,73.03 v78.11,70.17 | IC7.1 57.47,98.11 57.47,100.97 60.96,104.46 60.96,106.36 62.55,107.95 88.9,107.95 v88.9,87.63 | RN2.6 110.17,48.58 110.17,49.53 109.54,50.16 v109.54,64.14
BADDR13  (via drill 0.25)
  Top 0.203: IC11.7 39.69,68.9 44.45,68.9 45.4,67.94 50.48,67.94 51.75,69.22 v58.1,69.22 v78.74,69.22 | v111.76,72.07 99.06,72.07 95.57,75.56 v95.57,77.79 95.57,80.96 96.2,80.96 IC2.26
  Bottom 0.203: v58.1,69.22 58.42,69.53 58.42,80.01 60.96,82.55 60.96,96.52 IC7.2 | RN2.7 112.71,48.58 112.71,65.41 111.76,66.36 v111.76,72.07 | IC1.26 96.52,104.14 96.52,85.72 97.79,84.45 IC2.26 | v78.74,69.22 87.31,77.79 v95.57,77.79
BADDR14  (via drill 0.25)
  Top 0.203: IC11.9 42.86,77.15 v44.13,77.15 | v50.48,92.39 54.29,96.2 60.64,96.2 IC7.3 | v96.84,54.93 100.97,50.8 113.03,50.8 RN2.8 | IC1.1 91.12,88.58 86.36,88.58 85.72,87.95 85.72,77.47 88.27,77.47 90.81,74.93 | v91.12,74.61 90.81,74.93 | v50.8,80.33 52.07,79.06 78.42,79.06 82.55,74.93 90.81,74.93
  Bottom 0.203: 49.21,82.23 50.48,83.5 v50.48,92.39 | 49.21,82.23 v44.13,77.15 | v96.84,54.93 96.84,63.18 IC2.1 91.76,68.26 91.76,73.98 v91.12,74.61 | 49.21,82.23 50.8,80.64 v50.8,80.33
BADDR15  (via drill 0.25)
  Top 0.203: IC10.4 IC10.5 37.15,99.38 46.67,99.38 51.44,104.14 52.7,104.14 56.2,100.65 v69.53,100.65 72.39,100.65 78.74,107 121.92,107 121.92,104.46 v131.44,94.93 | v131.44,61.59 RN2.9
  Bottom 0.203: IC11.12 33.02,81.6 34.29,82.87 34.29,95.57 35.56,96.84 IC10.5 | IC7.6 69.53,98.11 v69.53,100.65 | v131.44,94.93 v131.44,61.59
BDATA0  (via drill 0.25)
  Top 0.203: v119.38,75.25 v119.38,77.15 | IC5.18 58.74,65.72 88.9,65.72 92.08,68.9 116.52,68.9 IC2.11
  Bottom 0.203: RN4.2 IC5.18 | IC13.11 119.38,25.4 119.38,66.04 IC2.11 118.11,73.98 v119.38,75.25 | IC1.11 118.43,89.85 118.43,84.45 119.38,83.5 v119.38,77.15
BDATA1  (via drill 0.25)
  Top 0.203: v121.92,77.15 121.92,72.71 122.87,71.75 122.87,68.9 122.24,68.9 IC2.12 | v63.5,58.42 63.82,58.1 v120.65,58.1
  Bottom 0.203: RN4.3 IC5.17 60.01,66.99 60.01,64.14 63.5,60.64 v63.5,58.42 | IC13.12 121.92,25.4 121.92,43.18 120.65,44.45 v120.65,58.1 IC2.12 | IC1.12 120.97,89.85 120.97,88.9 121.92,87.95 v121.92,77.15
BDATA2  (via drill 0.25)
  Top 0.203: IC2.13 124.78,68.9 131.44,68.9 131.44,85.41 130.49,86.36 127,86.36 IC1.13 121.6,91.76 81.28,91.76 v80.96,92.08
  Bottom 0.203: IC5.16 RN4.4 66.99,82.23 73.34,82.23 73.34,82.55 73.66,82.87 73.66,84.77 v80.96,92.08 | IC13.13 124.46,25.4 124.46,66.04 IC2.13
BDATA3  (via drill 0.25)
  Top 0.203: v73.98,63.82 75.56,62.23 v125.73,62.23
  Bottom 0.203: RN4.5 IC5.15 68.26,63.82 v73.98,63.82 | IC13.15 v125.73,62.23 125.73,65.09 127,66.36 127,81.28 | IC2.15 127,81.28 | IC1.15 127,104.14 127,81.28
BDATA4  (via drill 0.25)
  Top 0.203: v127.95,44.13 IC13.16 | IC2.16 v127.95,77.79 | v74.93,64.77 76.52,63.18 v126.68,63.18
  Bottom 0.203: RN4.6 IC5.14 69.85,64.77 v74.93,64.77 | v127.95,77.79 127.95,63.18 | 127.95,63.18 v127.95,44.13 | IC1.16 121.92,104.14 121.92,89.22 123.19,87.95 IC2.16 | 127.95,63.18 v126.68,63.18
BDATA5  (via drill 0.25)
  Top 0.203: v128.91,47.62 IC13.17 | IC2.17 v128.91,74.3 | v80.01,89.85 80.01,94.3 109.54,94.3 IC1.17
  Bottom 0.203: IC5.13 RN4.7 74.61,82.23 76.2,82.23 76.2,86.04 v80.01,89.85 | v128.91,74.3 v128.91,47.62 | IC1.17 119.38,104.14 119.38,89.22 120.65,87.95 IC2.17
BDATA6  (via drill 0.25)
  Top 0.203: v122.56,43.81 IC13.18 | v121.92,71.44 118.11,75.25 IC2.18 | v77.15,85.72 77.15,95.25 107.95,95.25 IC1.18
  Bottom 0.203: IC5.12 RN4.8 76.2,81.28 77.15,81.28 v77.15,85.72 | v122.56,43.81 121.92,44.45 v121.92,71.44 | IC1.18 116.84,104.14 116.84,84.77 118.11,83.5 IC2.18
BDATA7  (via drill 0.25)
  Top 0.203: IC13.19 115.57,45.72 119.06,45.72 132.4,59.05 132.4,65.72 120.02,65.72 119.38,66.36 119.38,71.12 116.52,71.12 | 116.52,71.12 114.94,72.71 114.94,82.55 IC2.19 | 116.52,71.12 v77.15,71.12
  Bottom 0.203: RN4.9 74.93,71.12 | 74.93,71.12 IC5.11 | IC1.19 114.3,104.14 114.3,83.82 IC2.19 | v77.15,71.12 74.93,71.12
DATA0  (via drill 0.25)
  Top 0.203: X1.A19 3.81,62.23 3.81,49.53 11.11,49.53 13.65,46.99 33.34,46.99 34.29,47.94 v56.83,47.94
  Bottom 0.203: IC5.2 56.83,57.47 56.83,51.12 RN3.2 57.15,48.26 v56.83,47.94
DATA1  (via drill 0.25)
  Top 0.203: X1.A20 0.95,61.91 0.95,44.45 11.75,44.45 12.38,45.09 21.59,45.09 22.54,46.04 33.66,46.04 34.61,46.99 v57.47,46.99
  Bottom 0.203: IC5.3 57.78,59.05 57.78,52.7 RN3.3 59.69,49.21 v57.47,46.99
DATA2  (via drill 0.25)
  Top 0.203: v14.92,42.86 21.91,42.86 23.18,44.13 42.86,44.13 43.81,45.09 v57.15,45.09
  Bottom 0.203: IC5.4 59.69,53.34 RN3.4 62.23,50.16 v57.15,45.09 | X1.A21 6.35,67.31 8.89,67.31 8.89,45.4 9.84,44.45 14.92,44.45 v14.92,42.86
DATA3  (via drill 0.25)
  Top 0.203: X1.A22 6.35,69.85 v13.34,69.85 | v15.88,41.91 22.23,41.91 23.5,43.18 43.18,43.18 44.13,44.13 v47.94,44.13 | v51.12,48.9 51.44,49.21 63.18,49.21 RN3.5
  Bottom 0.203: RN3.5 62.23,53.34 IC5.5 | v13.34,69.85 15.88,67.31 v15.88,41.91 | v47.94,44.13 51.12,47.31 v51.12,48.9
DATA4  (via drill 0.25)
  Top 0.203: X1.A23 6.35,72.39 18.1,72.39 22.23,76.52 v29.53,76.52 | v32.07,78.11 51.75,78.11 56.83,73.03 v63.18,73.03
  Bottom 0.203: RN3.6 66.99,51.12 66.99,57.47 IC5.6 64.77,60.64 63.5,61.91 63.5,72.71 v63.18,73.03 | v29.53,76.52 32.07,76.52 v32.07,78.11
DATA5  (via drill 0.25)
  Top 0.203: v14.92,38.42 40.96,38.42 v45.72,43.18 | v49.85,48.9 53.34,52.39 68.26,52.39 RN3.7
  Bottom 0.203: RN3.7 67.94,52.7 67.94,58.1 67.31,58.74 IC5.7 | X1.A24 3.81,74.93 3.81,55.56 4.76,54.61 6.35,54.61 6.35,42.86 7.3,41.91 14.92,41.91 v14.92,38.42 | v45.72,43.18 49.85,47.31 v49.85,48.9
DATA6  (via drill 0.25)
  Top 0.203: v11.43,52.39 13.97,49.85 22.86,49.85 23.18,49.53 49.21,49.53 53.02,53.34 69.85,53.34 RN3.8
  Bottom 0.203: RN3.8 72.07,51.12 72.07,57.47 IC5.8 | X1.A25 6.35,77.47 11.43,77.47 v11.43,52.39
DATA7  (via drill 0.25)
  Top 0.203: X1.A26 3.81,80.01 3.81,67.31 5.4,67.31 6.35,66.36 6.35,64.77 v20.64,64.77 | v26.67,68.58 26.67,65.72 v39.69,65.72 | v41.91,63.5 68.58,63.5 IC5.9
  Bottom 0.203: RN3.9 73.03,52.7 73.03,59.05 IC5.9 | v20.64,64.77 21.59,65.72 21.59,68.26 22.23,68.9 26.67,68.9 v26.67,68.58 | v41.91,63.5 v39.69,65.72
FORCE-ROM  (via drill 0.25)
  Top 0.203: IC12.5 33.97,50.48 v23.5,50.48
  Bottom 0.203: v23.5,50.48 22.86,51.12 IC11.1
GND
  Top 0.203: PWR.K 152.4,24.13 IC13.14 116.84,33.02 C3.2 76.2,33.02 | 76.2,33.02 IC8.10 | C5.2 49.53,36.83 | 49.53,36.83 IC8.1 | 49.53,36.83 IC8.19 | X1.A1 X1.B1 X1.C1 15.24,22.86 C4.2 49.53,20.32 | 49.53,20.32 IC9.1 | 49.53,20.32 52.7,23.5 | 52.7,23.5 IC9.19 | 69.22,23.5 IC9.10 | 52.7,23.5 69.22,23.5 | X1.A32 X1.B32 X1.C32 12.7,96.52 13.34,95.89 | 13.34,95.89 C10.2 | 13.34,95.89 C9.2 | 21.59,71.12 IC11.15 | C11.2 21.59,71.12 | 27.94,57.15 IC12.13 IC12.12 IC12.11 IC12.10 41.91,66.04 | 27.94,57.15 IC12.2 | 27.94,57.15 21.59,57.15 | 21.59,57.15 C12.2 | 21.59,57.15 21.59,71.12 | IC6.7 45.72,88.9 49.53,88.9 | C7.2 49.53,88.9 | 49.53,88.9 43.81,94.61 | 43.81,94.61 IC10.7 | 43.81,94.61 C8.2 55.24,99.69 69.22,99.69 | 69.22,99.69 IC7.5 | 69.22,99.69 73.03,99.69 IC7.8 76.2,97.79 | C1.2 86.36,97.79 76.2,97.79 | C2.2 82.55,76.2 IC4.7 76.2,83.82 76.2,97.79 | 41.91,66.04 43.18,64.77 C6.2 69.85,64.77 IC5.10 | 41.91,66.04 IC11.8 | 76.2,33.02 76.2,23.5 69.22,23.5
  Bottom 0.203: IC8.1 54.61,31.75 IC9.19 | IC12.10 35.56,57.15 IC12.7 40.64,45.72 C5.2 | C10.2 17.78,86.36 C11.2 | IC2.14 124.46,68.58 124.46,76.2 | 124.46,76.2 124.46,88.9 IC1.14 | IC5.10 74.93,63.5 C2.2 124.46,76.2
MEM-RD
  Top 0.203: IC6.1 26.99,85.41 36.51,85.41 IC6.6
N$1
  Bottom 0.203: IC6.13 30.8,94.3 30.8,95.89 31.75,96.84 31.75,104.14 IC10.11
N$2
  Top 0.203: IC6.3 28.89,82.23 24.77,82.23 24.13,82.87 24.13,88.9 30.16,88.9 31.75,90.49 31.75,93.03 39.05,93.03 IC6.8
N$3  (via drill 0.25)
  Top 0.203: IC13.22 115.25,46.67 118.75,46.67 v130.49,58.42 | v130.49,85.09 130.18,85.41 110.81,85.41 IC2.22 | v43.18,109.86 103.5,109.86 v105.41,107.95
  Bottom 0.203: v130.49,85.09 v130.49,58.42 | IC6.2 31.75,87.63 31.75,94.3 34.29,96.84 34.29,98.74 38.42,102.87 43.18,102.87 v43.18,109.86 | IC1.22 106.68,106.68 | 106.68,106.68 v105.41,107.95 | IC2.22 106.68,83.82 106.68,106.68
N$4  (via drill 0.25)
  Top 0.203: IC6.4 34.92,81.92 37.47,81.92 40.32,79.06 v40.96,79.06 | v46.99,73.03 54.29,73.03 55.24,72.07 v86.68,72.07 92.39,72.07 94.61,74.3 94.61,82.55 IC2.27 | IC13.27 93.66,37.78 92.08,37.78 v90.49,39.37
  Bottom 0.203: v46.99,73.03 v40.96,79.06 | v90.49,39.37 86.68,43.18 v86.68,72.07 | IC1.27 93.98,104.14 93.98,83.82 IC2.27
N$5  (via drill 0.25)
  Top 0.203: v70.17,94.3 IC4.11
  Bottom 0.203: v70.17,94.3 71.12,95.25 71.12,104.14 IC7.10
N$6
  Bottom 0.203: IC4.6 66.36,89.85 63.5,89.85 63.5,101.92 66.04,104.46 66.04,106.36 66.67,107 69.85,107 IC7.11
N$7  (via drill 0.25)
  Top 0.203: v66.04,94.3 66.04,86.36 67.31,86.36 IC4.5
  Bottom 0.203: IC7.12 66.99,105.09 66.99,99.69 66.04,98.74 v66.04,94.3
N$8  (via drill 0.25)
  Top 0.203: IC4.4 62.55,88.58 v60.01,88.58 | v59.05,94.61 v57.78,93.34
  Bottom 0.203: v60.01,88.58 57.78,90.81 v57.78,93.34 | v59.05,94.61 58.42,95.25 58.42,99.06 IC7.13
N$9  (via drill 0.25)
  Top 0.203: IC4.3 66.36,82.23 70.48,82.23 71.12,82.87 71.12,95.57 v69.85,95.57 | v68.58,102.55 67.31,103.82 63.82,103.82 IC7.14
  Bottom 0.203: v69.85,95.57 68.58,96.84 v68.58,102.55
N$10  (via drill 0.25)
  Top 0.203: v57.78,88.27 IC4.2
  Bottom 0.203: v57.78,88.27 52.7,93.34 52.7,97.79 50.8,99.69 50.8,103.5 54.29,107 59.69,107 IC7.15
N$11
  Top 0.203: R2.1 166.37,2.54 173.99,2.54 PWR.A
N$12
  Bottom 0.203: IC10.2 29.21,99.06 29.21,106.36 29.84,107 36.83,107 36.83,104.46 37.47,103.82 40.64,103.82 IC10.8
N$13
  Top 0.203: IC10.1 26.99,96.2 36.51,96.2 IC10.6
N$14
  Top 0.203: IC6.11 39.37,85.09 39.37,81.28 72.07,81.28 73.66,82.87 73.66,91.44 IC4.8
N$15  (via drill 0.25)
  Top 0.203: v77.79,50.16 73.34,54.61 v28.89,54.61
  Bottom 0.203: IC9.9 75.25,20.64 77.79,20.64 v77.79,50.16 | v28.89,54.61 26.67,54.61 26.67,51.12 26.04,50.48 24.45,50.48 24.45,50.8 24.13,51.12 24.13,66.04 IC11.2
N$16  (via drill 0.25)
  Top 0.203: v60.33,32.07 53.34,32.07 53.02,31.75 v50.16,31.75
  Bottom 0.203: IC9.7 63.5,21.59 63.5,28.89 v60.33,32.07 | v50.16,31.75 34.29,47.62 34.29,66.04 IC11.5
N$17  (via drill 0.25)
  Top 0.203: v48.9,26.04 v51.44,23.5 | v31.75,68.58 34.29,71.12 v39.05,71.12
  Bottom 0.203: IC9.5 56.52,23.5 v51.44,23.5 | v48.9,26.04 31.75,43.18 v31.75,68.58 | v39.05,71.12 39.37,71.44 39.37,75.88 38.73,76.52 35.56,76.52 IC11.11
N$18  (via drill 0.25)
  Top 0.203: v49.85,21.91 46.67,25.08 v39.05,25.08
  Bottom 0.203: IC9.3 53.02,21.91 v49.85,21.91 | v39.05,25.08 17.78,46.35 17.78,66.67 16.51,67.94 16.51,87 19.68,90.17 24.13,90.17 24.13,78.74 IC11.14
VCC
  Top 0.203: C9.1 IC10.14 | X1.A31 X1.B31 X1.C31 17.78,86.36 C10.1 IC6.14 | IC12.1 22.86,54.61 C12.1 | X1.A2 X1.B2 X1.C2 | IC2.28 92.71,73.66 C2.1 | IC1.28 92.71,96.52 C1.1 | C7.1 55.88,87.63 | 55.88,87.63 57.78,89.53 | 57.78,89.53 IC4.14 | IC4.12 62.87,89.53 57.78,89.53 | 55.88,87.63 IC4.1
  Bottom 0.203: R2.2 97.79,3.81 RN1.1 87.63,19.05 C3.1 88.9,31.75 88.9,35.56 IC13.28 97.79,44.45 RN2.1 87.63,58.42 C2.1 | C9.1 25.4,95.25 IC6.14 | 38.1,69.85 IC11.6 | IC11.10 38.1,73.03 | 38.1,73.03 38.1,69.85 | IC12.1 IC12.14 25.4,64.77 IC11.3 27.94,69.85 26.67,71.12 | 26.67,71.12 23.5,74.3 | 23.5,74.3 IC11.16 22.86,83.82 C10.1 | 26.67,71.12 28.57,73.03 | 28.57,73.03 IC11.13 | 23.5,74.3 C11.1 | 28.57,73.03 38.1,73.03 | X1.C2 C4.1 IC9.20 52.07,31.75 C5.1 IC8.20 52.07,48.26 RN3.1 46.99,58.42 C6.1 IC5.20 54.61,69.85 | IC2.28 87.63,87.63 87.63,93.34 | C1.1 87.63,93.34 | IC7.16 C8.1 59.69,92.71 IC4.14 | IC4.1 59.69,82.55 RN4.1 54.61,69.85 | 87.63,93.34 64.77,93.34 IC4.12 | 54.61,69.85 38.1,69.85

## Text on the board
tNames: YACC1 MEMORY BOARD V1.2 | 0 | onepagecomputer.com